# Altium PCB PCB1.PcbDoc
Units mm, origin at the board's own origin, x right, y up, seen from the top; angles counter-clockwise.
Board outline 80.12 x 80.12 mm, 2 copper layers (Top Layer, Bottom Layer); 64 components, 50 nets, 273 pads, 111 vias.
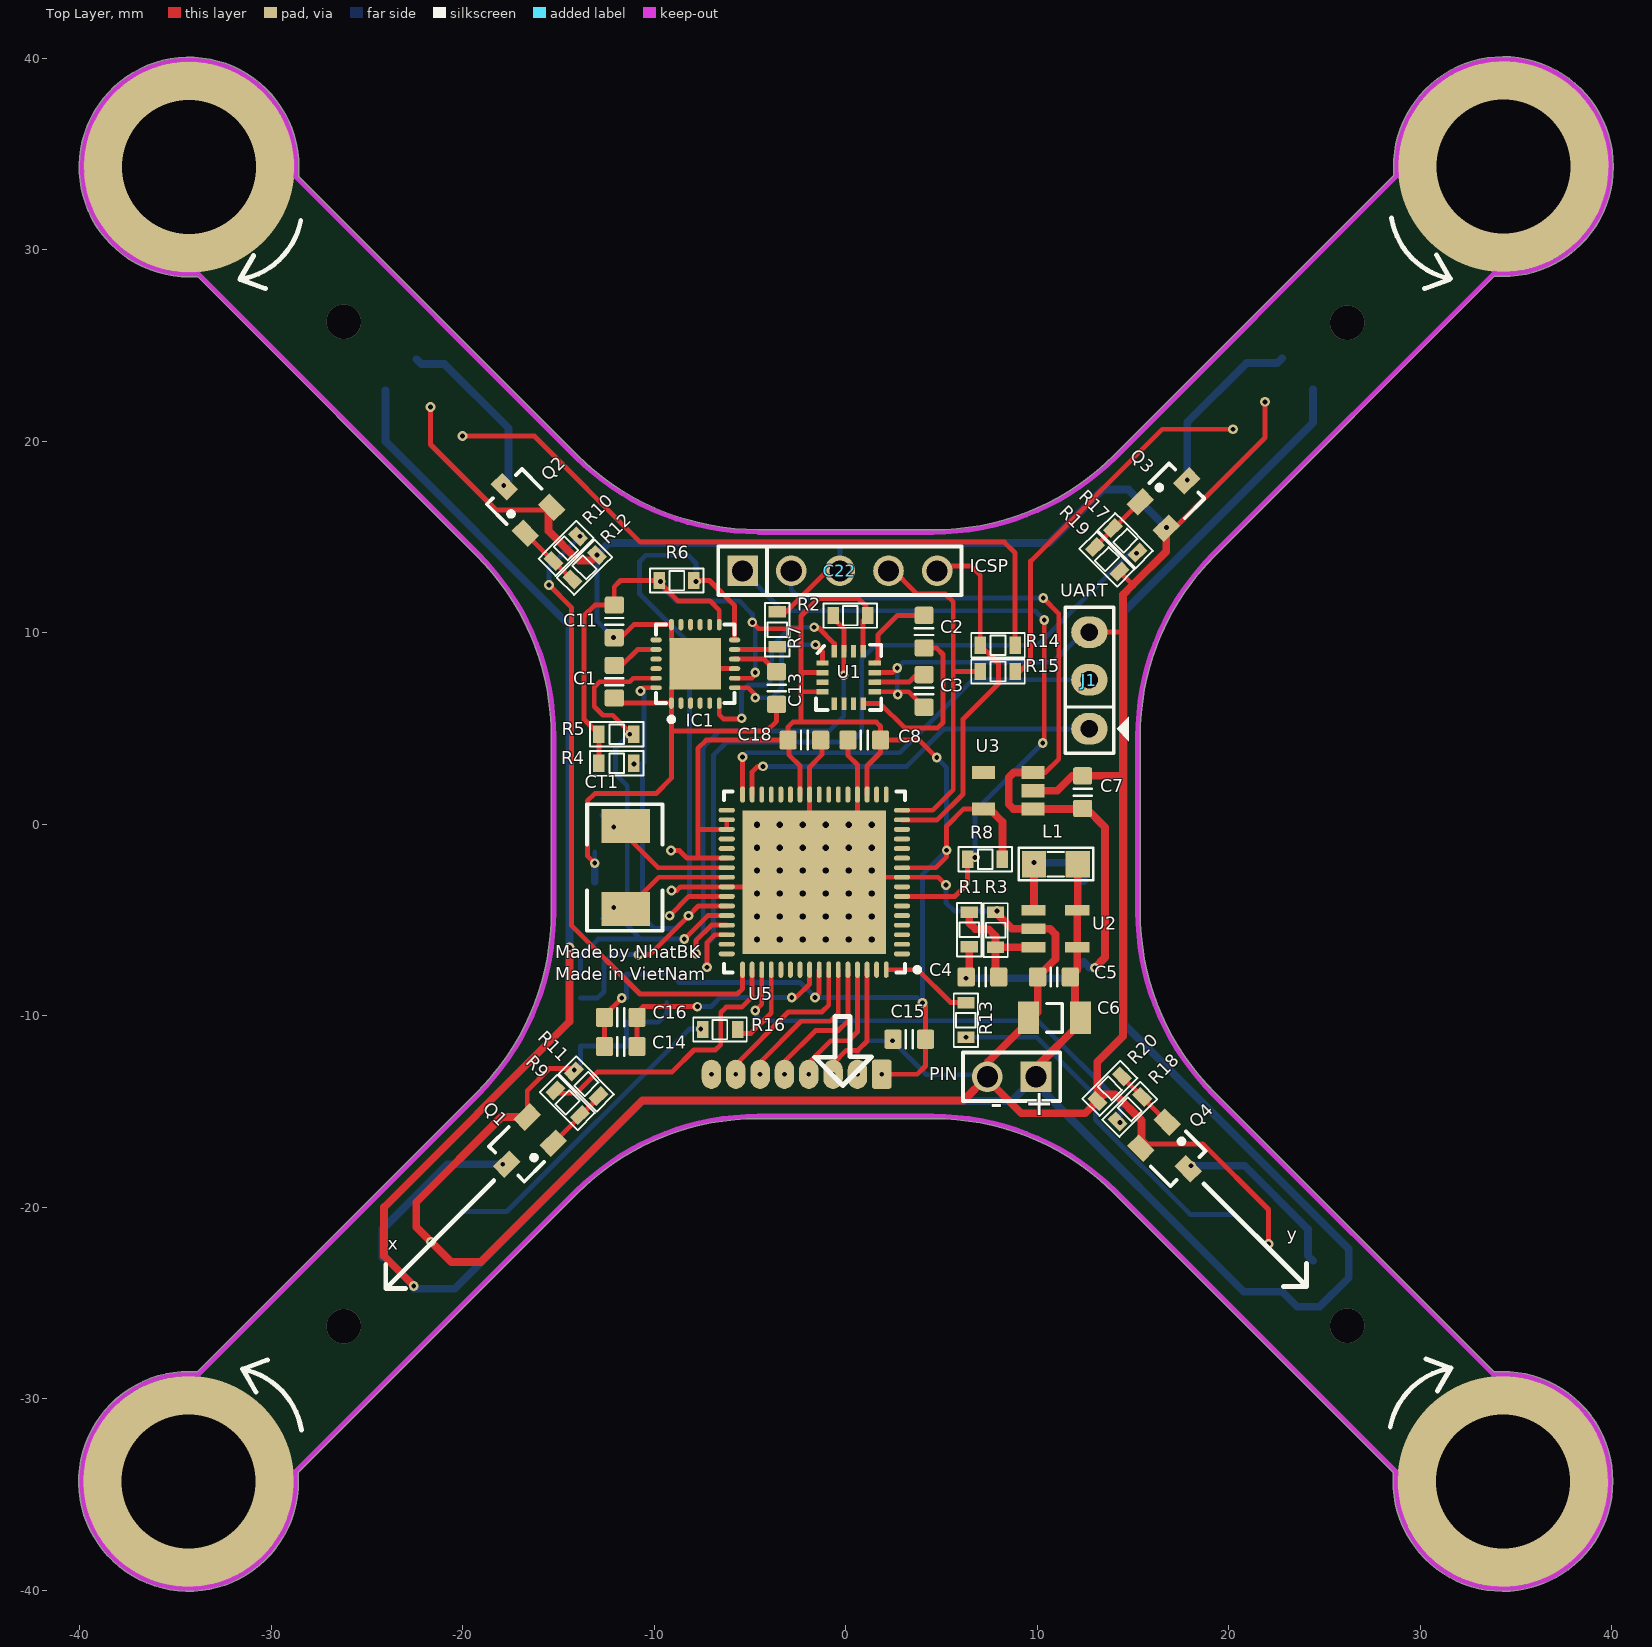
[diagram p0: Top Layer view]
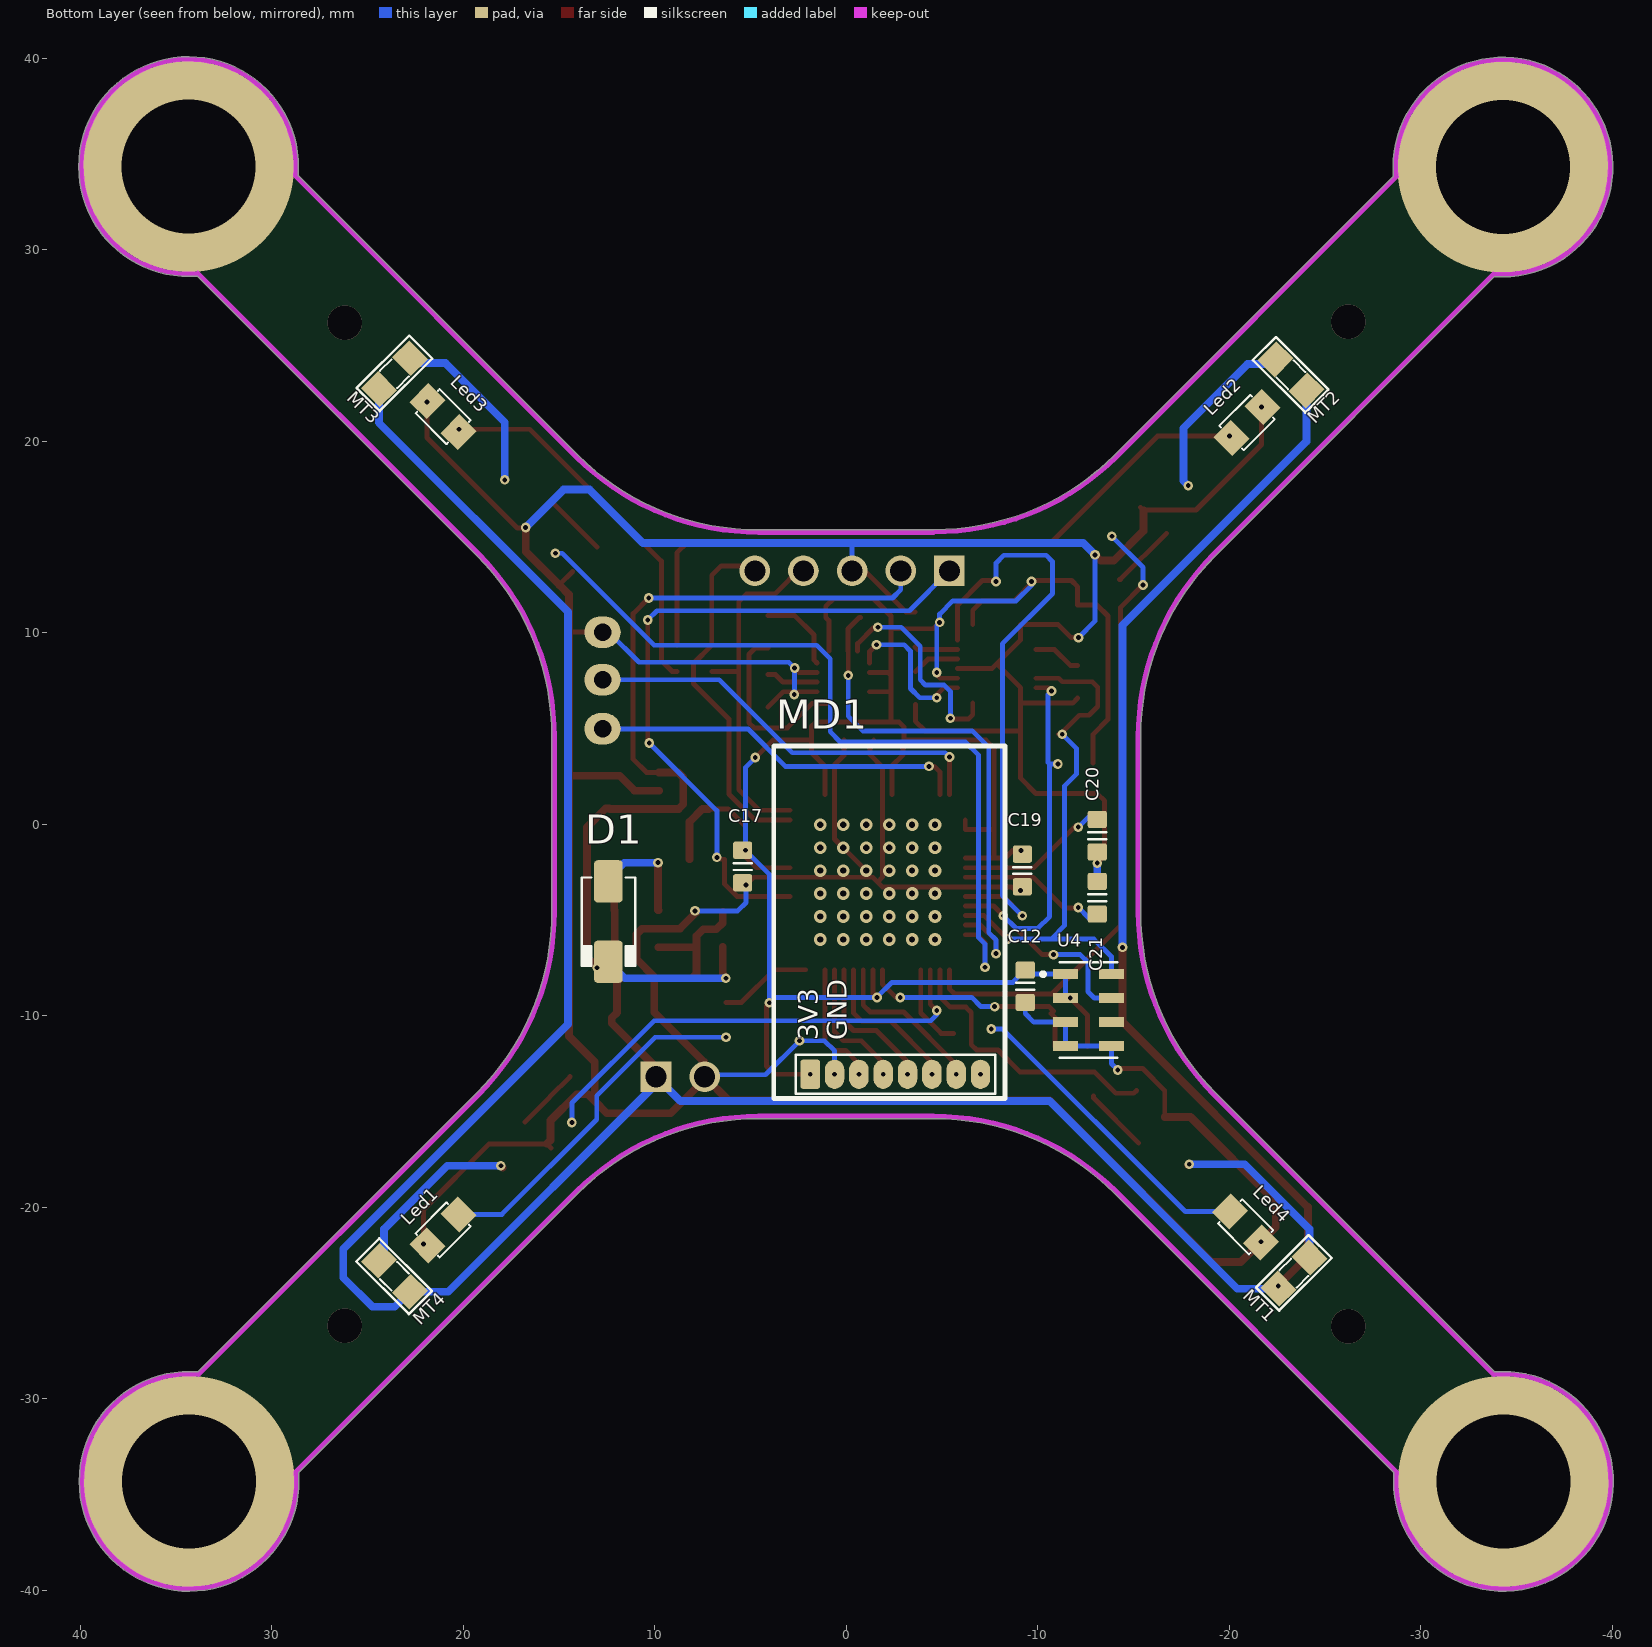
[diagram p1: Bottom Layer view, seen from below]
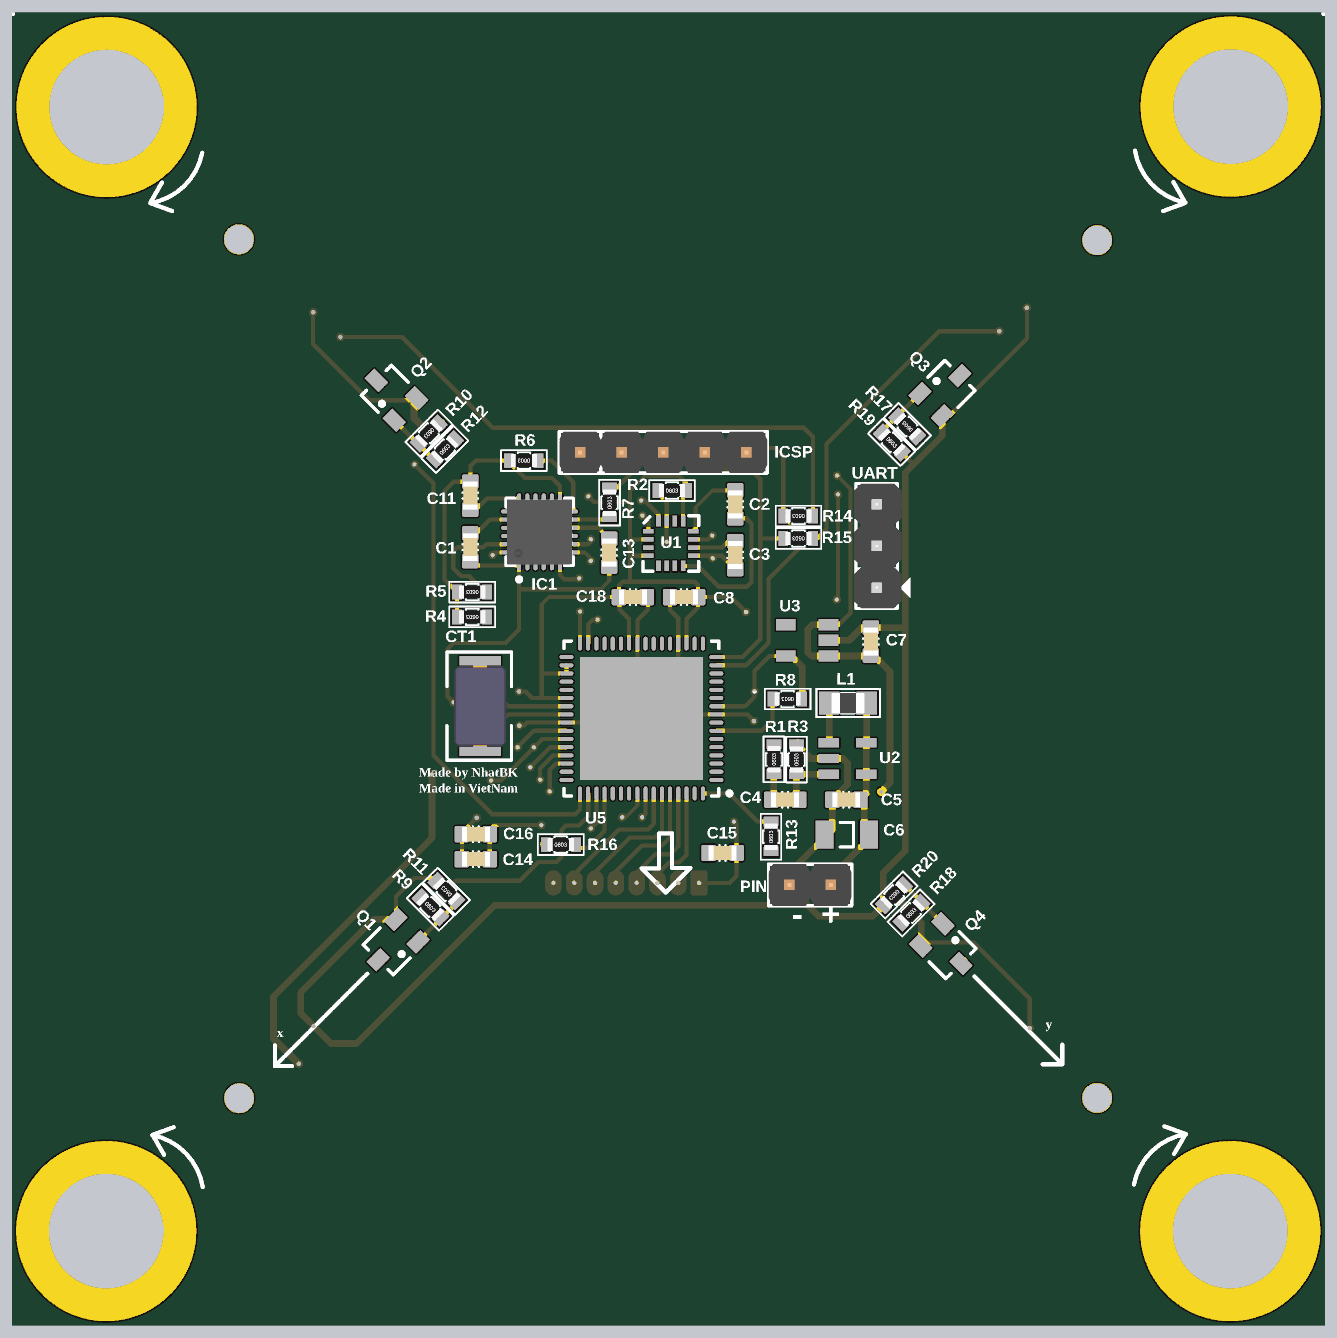
[diagram p2: 3D render of the assembled board from above, using the file's embedded part models]
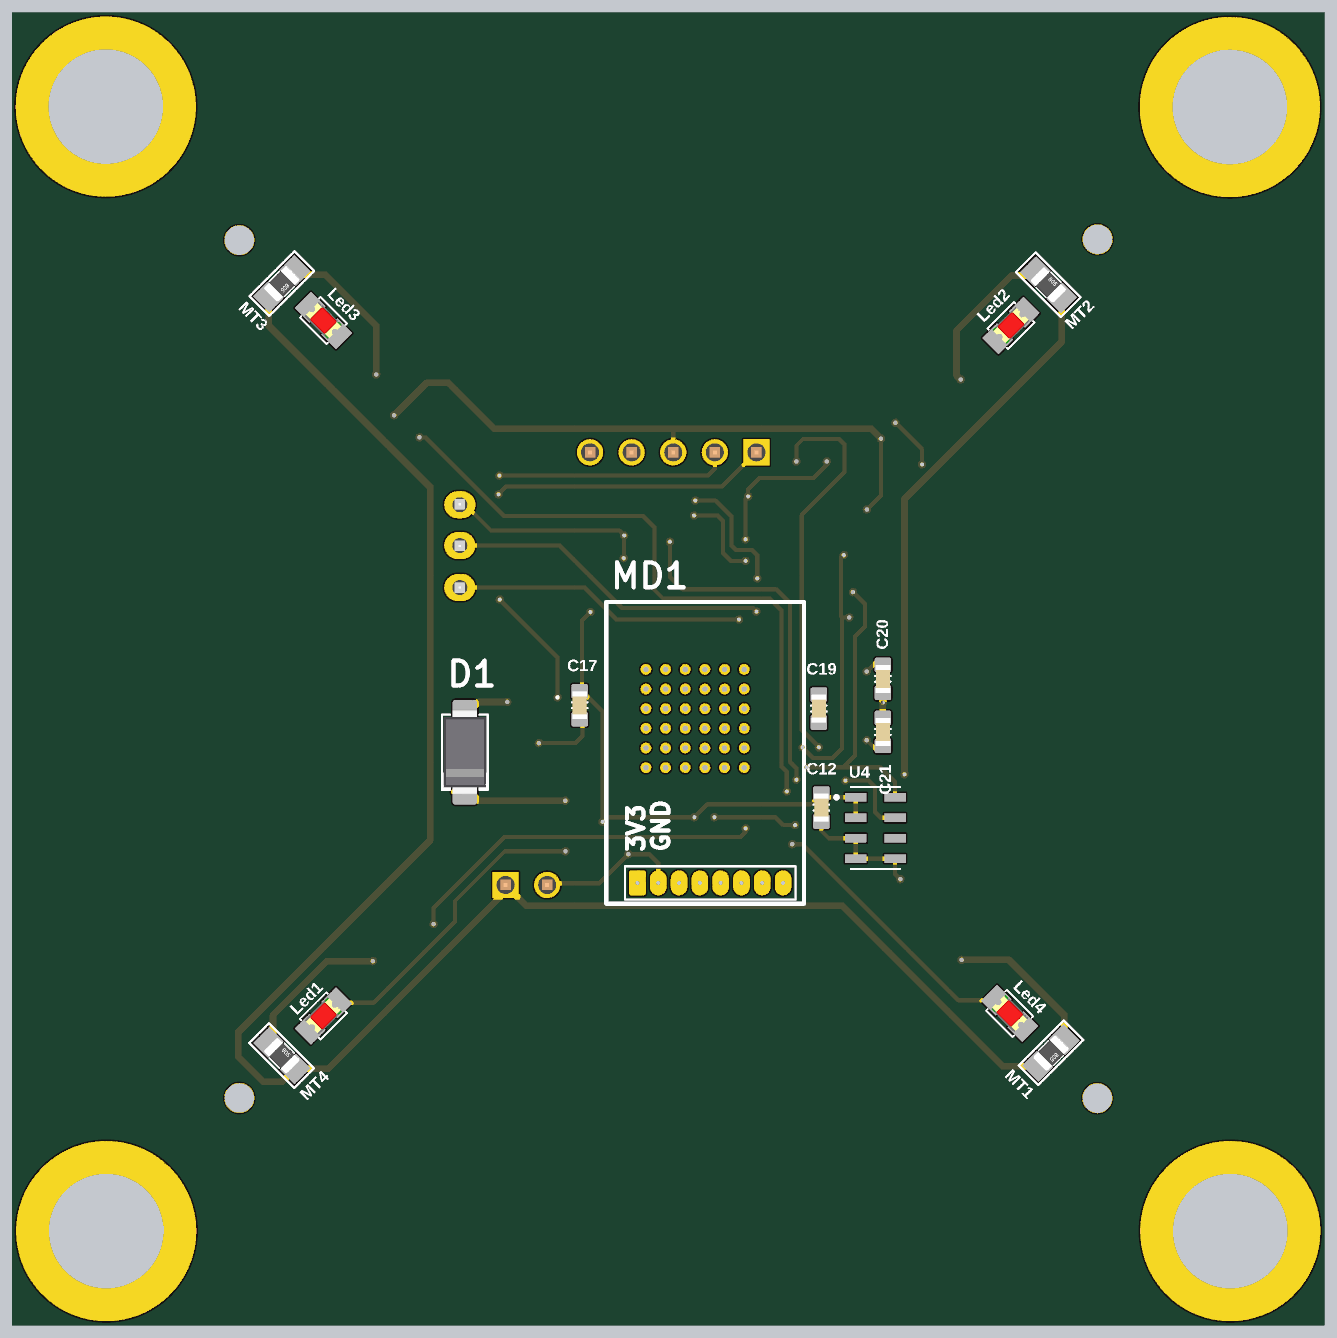
[diagram p3: 3D render of the assembled board from below, using the file's embedded part models]

## Layer stack, top to bottom
Top Solder: solder mask 0.0102, Solder Resist, Dk 3.5
Top Layer: signal copper 0.0356
Dielectric 1: dielectric 0.32, FR-4, Dk 4.8
Bottom Layer: signal copper 0.0356
Bottom Solder: solder mask 0.0102, Solder Resist, Dk 3.5

## Board outline
-33.856,-28.595 ccw(c-34.313,-34.313) -28.577,-34.313 ccw(c-34.313,-34.313) -28.595,-33.856 -14.021,-19.281 ccw(c-14.111,-19.191) -14.013,-19.272 cw(c-4.574,-28.729) -4.572,-15.367 ccw(c-4.572,-15.24) -4.572,-15.367 4.572,-15.367 cw(c4.572,-28.731) 14.021,-19.281 28.595,-33.856 ccw(c34.313,-34.313) 40.048,-34.313 ccw(c34.313,-34.313) 33.856,-28.595 19.281,-14.021 cw(c19.191,-14.111) 19.282,-14.022 19.281,-14.021 cw(c28.731,-4.572) 19.281,-14.021 cw(c28.731,-4.572) 15.367,-4.572 15.367,4.572 cw(c28.731,4.572) 19.281,14.021 ccw(c19.191,14.111) 19.282,14.022 19.281,14.021 33.881,28.621 ccw(c34.338,34.338) 40.073,34.338 ccw(c34.338,34.338) 28.621,33.881 14.021,19.281 cw(c14.111,19.191) 14.022,19.282 14.021,19.281 ccw(c14.111,19.191) 14.021,19.281 ccw(c4.572,28.731) 14.021,19.281 cw(c4.572,28.731) 4.572,15.367 -4.502,15.367 ccw(c-4.572,15.261) -4.573,15.389 cw(c-4.623,28.68) -14.021,19.281 ccw(c-14.111,19.191) -14.021,19.281 ccw(c-14.111,19.191) -14.022,19.282 -14.021,19.281 -28.572,33.832 ccw(c-34.287,34.313) -28.552,34.313 ccw(c-34.287,34.313) -33.854,28.594 -19.281,14.021 cw(c-28.731,4.572) -19.281,14.021 cw(c-19.191,14.111) -19.281,14.021 cw(c-19.191,14.111) -19.282,14.022 -19.281,14.021 cw(c-28.731,4.572) -15.367,4.572 -15.367,-4.572 cw(c-28.731,-4.572) -19.281,-14.021 ccw(c-19.191,-14.111) -19.281,-14.021 ccw(c-28.731,-4.572) -19.281,-14.021

## Design rules (kind name [scope] priority, off if disabled: settings)
Clearance [All] p1: gap=0.203
PolygonConnect [All] p1: connectstyle=Relief reliefconductorwidth=0.254 reliefentries=4 polygonreliefangle="90 Angle" airgapwidth=0.254
RoomDefinition Sheet1 [InComponentClass('Sheet1')] p1: confinementstyle=ConfineIn formatcopy=TRUE lockcomponents=FALSE outline 94.361,-48.768 253.873,-48.768 253.873,-34.798 94.361,-34.798
RoutingVias [All] p1: holewidth=0.254 width=0.508 viastyle="Through Hole" minholewidth=0.254 minwidth=0.508 maxholewidth=0.254 maxwidth=0.508
SolderMaskExpansion [All] p1: expansion=0.102
Width [All] p1: maxlimit=0.635 minlimit=0.254 preferedwidth=0.406
30 further rules are at their usual default settings.

## Components (designator, comment, footprint, x,y, rotation, side; value= is the part's Value field where it differs from the comment)
C1 "105" CAPC1608X90N -12.084,7.442 r270 top
C2 "224" CAPC1608X90N 4.089,10.058 r270 top
C3 "475" CAPC1608X90N 4.089,6.96 r270 top
C4 "221" CAPC1608X90N 7.137,-7.976 r180 top
C5 "104" CAPC1608X90N 10.871,-7.976 r0 top
C6 "tatanlum" CM_S_1206 10.897,-10.109 r180 top
C7 "106" CAPC1608X90N 12.37,1.676 r270 top
C8 "105" CAPC1608X90N 0.965,4.394 r0 top
C11 "105" CAPC1608X90N -12.084,10.592 r90 top
C12 "105" CAPC1608X90N -9.349,-8.458 r90 bottom
C13 "104" CAPC1608X90N -3.607,7.112 r90 top
C14 "104" CAPC1608X90N -11.747,-11.608 r180 top
C15 "106" CAPC1608X90N 3.316,-11.227 r180 top
C16 "106" CAPC1608X90N -11.747,-10.084 r180 top
C17 "105" CAPC1608X90N 5.41,-2.21 r90 bottom
C18 "105" CAPC1608X90N -2.159,4.394 r180 top
C19 "105" CAPC1608X90N -9.195,-2.413 r90 bottom
C20 "22p" CAPC1608X90N -13.106,-0.598 r270 bottom
C21 "22p" CAPC1608X90N -13.106,-3.835 r90 bottom
C22 "ICSP" JP5-D1T -5.385,13.233 r0 top
CT1 "8Mhz" CRYSTAL-SMD5032 -11.481,-2.261 r90 top
D1 "Diode  Schottky 1N5819" DO-214AC 12.421,-5.08 r270 bottom
IC1 "MPU6050" MPU6050 -7.854,8.375 r90 top
J1 "UART" JP3 12.725,7.518 r90 top
L1 "L/0805" SM-IND-0805 12.116,-2.083 r180 top
Led1 "LED" LED-0805-Red 20.244,-20.371 r315 bottom
Led2 "LED" LED-0805-Red -20.117,20.168 r135 bottom
Led3 "LED" LED-0805-Red 20.244,20.472 r45 bottom
Led4 "LED" LED-0805-Red -20.041,-20.218 r225 bottom
MD1 "NRF24L01" "nRF24l01 Mini" 1.88,-13.056 r180 bottom
MT1 "coreless 716" SM-RES-0805 -24.181,-22.631 r315 bottom
MT2 "coreless 716" SM-RES-0805 -22.412,24.273 r225 bottom
MT3 "coreless 716" SM-RES-0805 22.784,24.333 r315 bottom
MT4 "coreless 716" SM-RES-0805 24.4,-22.793 r225 bottom
PIN "Pin3.7V" JP2-D1T 9.931,-13.183 r180 top
Q1 "Si2302" SOT23 -16.815,-16.866 r135 top
Q2 "Si2302" SOT23 -16.942,16.739 r45 top
Q3 "Si2302" SOT23 16.916,17.043 r315 top
Q4 "Si2302" SOT23 16.993,-17.094 r225 top
R1 "33k/0603" RES-SMD-0603 6.452,-5.512 r90 top
R2 "4.7k/0603" RES-SMD-0603 0.229,10.897 r0 top
R3 "10k/0603" RES-SMD-0603 7.823,-5.524 r90 top
R4 "4.7k/0603" RES-SMD-0603 -11.963,3.185 r180 top
R5 "4.7k/0603" RES-SMD-0603 -11.963,4.699 r180 top
R6 "4.7k/0603" RES-SMD-0603 -8.814,12.725 r180 top
R7 "1k/0603" RES-SMD-0603 -3.581,10.16 r90 top
R8 "Res" RES-SMD-0603 7.29,-1.829 r180 top
R9 "100/0603" RES-SMD-0603 -14.529,-14.529 r315 top
R10 "100/0603" RES-SMD-0603 -14.605,14.402 r225 top
R11 "33k/0603" RES-SMD-0603 -13.538,-13.564 r135 top
R12 "33k/0603" RES-SMD-0603 -13.64,13.411 r45 top
R13 "1k" RES-SMD-0603 6.274,-10.236 r90 top
R14 "1k" RES-SMD-0603 7.95,9.347 r180 top
R15 "1k" RES-SMD-0603 7.95,7.976 r180 top
R16 "1k" RES-SMD-0603 -6.566,-10.719 r0 top
R17 "100/0603" RES-SMD-0603 14.605,14.808 r135 top
R18 "100/0603" RES-SMD-0603 14.827,-14.891 r45 top
R19 "33k/0603" RES-SMD-0603 13.64,13.843 r315 top
R20 "33k/0603" RES-SMD-0603 13.792,-13.792 r225 top
U1 "HMC5883L" 16LPCC 0.156,7.669 r0 top
U2 "LM27313XMF" SOT95P285X120-5N 10.947,-5.461 r0 top
U3 "MIC5205/SPX3819M5" SOT-23-5 8.484,1.753 r90 top
U4 "MS561101BA03-50" SON125P500X300X100-8N -12.649,-9.703 r180 bottom
U5 "PIC32MX440F256H-80I/MR" QFN-MR64_M -1.638,-3.02 r180 top

## Footprints (in the part's own frame and the unit in brackets; to place one, negate y for a bottom-side part, rotate by r counter-clockwise, add the part's x,y. Pads: shape width x height; smd on the part's side, far side on the other; paste and mask are expansions set on the pad)
16LPCC [mm]
  rect 0.65x0.28 smd: 1(-1.37,0.75) 2(-1.37,0.25) 3(-1.37,-0.25) 4(-1.37,-0.75) 9(1.37,-0.75) 10(1.37,-0.25) 11(1.37,0.25) 12(1.37,0.75)
  rect 0.28x0.65 smd: 5(-0.75,-1.37) 6(-0.25,-1.37) 7(0.25,-1.37) 8(0.75,-1.37) 13(0.75,1.37) 14(0.25,1.37) 15(-0.25,1.37) 16(-0.75,1.37)
  silkscreen extent -1.7,-1.7 1.7,1.7
CAPC1608X90N [mm] "Chip Capacitor, Body 1.6x0.8mm, EIA 0603, IPC Medium Density"
  round 0.254 on Mech15: 0(0,0)
  rrect25% 0.9x1 smd: 1(-0.85,0) 2(0.85,0)
  silkscreen extent -0.18,-0.48 0.18,0.48, body extent -0.85,-0.45 0.85,0.45, height 0.89
CM_S_1206 [mm] "Chip Capacitor, Body 3.2x1.6mm, IPC High Density"
  rect 1.1x1.7 smd: 1(-1.35,0) 2(1.35,0)
  silkscreen extent -0.41,-0.75 0.4,0.75, body extent -1.7,-0.9 1.7,0.9, height 1.3
CRYSTAL-SMD5032 [mil] "DO-214-AA/SMB; 2 C-Bend Leads; Body 5.3 x 3.6 mm, inc. leads (LxW)"
  rect 70x100 smd: 1(-85,0) 2(85,0)
  silkscreen extent -130,-75 130,80, body extent -98,-63 98,63, height 51
DO-214AC [mm] "JEDEC DO214 variation AC. SMA"
  round 0.508 on Mech15: 0(0,0)
  rrect25% 2.2x1.5 smd: A(-2.1,0) K(2.1,0)
  silkscreen extent -2.3,-1.4 2.3,1.4, body extent -2.6,-1.3 2.6,1.3, height 2.42
JP2-D1T [mm] "2 pins, 1 row, straight, gold plating"
  rect 1.6x1.6 hole 1.1: 1(0,0)
  round 1.6 hole 1.1: 2(2.54,0)
  silkscreen extent -1.27,-1.27 3.81,1.27, body extent -1.27,-1.27 3.81,1.27, height 8.54
JP3 [mil] "Jumper 3"
  oval 65x75 hole 36: 1(-100,0) 2(1,0) 3(99,0)
  silkscreen extent -150,-81 150,50, body extent -150,-60 150,55, height 355
JP5-D1T [mm] "5 pins, 1 row, straight, gold plating"
  rect 1.6x1.6 hole 1.1: 1(0,0)
  round 1.6 hole 1.1: 2(2.54,0) 3(5.08,0) 4(7.62,0) 5(10.16,0)
  silkscreen extent -1.27,-1.27 11.43,1.27, body extent -1.27,-1.27 11.43,1.27, height 8.54
LED-0805-Red [mil]
  rect 50x55 smd: 1(0,0) 2(90,0)
  silkscreen extent 0,-35 90,35, body extent 5,-25 85,25, height 43
MPU6050 [mm] "QFN-24N"
  oval 0.6x0.25 smd: 1(-2.05,1.25) 2(-2.05,0.75) 3(-2.05,0.25) 4(-2.05,-0.25) 5(-2.05,-0.75) 6(-2.05,-1.25) 13(2.05,-1.25) 14(2.05,-0.75) 15(2.05,-0.25) 16(2.05,0.25) 17(2.05,0.75) 18(2.05,1.25)
  oval 0.25x0.6 smd: 7(-1.25,-2.05) 8(-0.75,-2.05) 9(-0.25,-2.05) 10(0.25,-2.05) 11(0.75,-2.05) 12(1.25,-2.05) 19(1.25,2.05) 20(0.75,2.05) 21(0.25,2.05) 22(-0.25,2.05) 23(-0.75,2.05) 24(-1.25,2.05)
  rect 2.7x2.7 smd: 25(0,0)
  silkscreen extent -3.02,-2.05 2.05,2.05, body extent -2,-2 2,2, height 1
"nRF24l01 Mini" [mil] "Connector; Header; 6 Position, 0.050\" pitch"
  oval 40x60 hole 10: 1(50,0) 3(100,0) 4(150,0) 5(200,0) 6(250,0) 7(300,0) 8(350,0)
  rrect25% 40x60 hole 10: 2(0,0)
  silkscreen extent -75,-50 400,675
QFN-MR64_M [mm] "QFN, 64-Leads, Body 9x9mm, Pitch 0.5mm, IPC Low Density"
  oval 0.85x0.25 smd: 1(-4.575,3.75) 2(-4.575,3.25) 3(-4.575,2.75) 4(-4.575,2.25) 5(-4.575,1.75) 6(-4.575,1.25) 7(-4.575,0.75) 8(-4.575,0.25) 9(-4.575,-0.25) 10(-4.575,-0.75) 11(-4.575,-1.25) 12(-4.575,-1.75) 13(-4.575,-2.25) 14(-4.575,-2.75) 15(-4.575,-3.25) 16(-4.575,-3.75) 33(4.575,-3.75) 34(4.575,-3.25) 35(4.575,-2.75) 36(4.575,-2.25) 37(4.575,-1.75) 38(4.575,-1.25) 39(4.575,-0.75) 40(4.575,-0.25) 41(4.575,0.25) 42(4.575,0.75) 43(4.575,1.25) 44(4.575,1.75) 45(4.575,2.25) 46(4.575,2.75) 47(4.575,3.25) 48(4.575,3.75)
  oval 0.25x0.85 smd: 17(-3.75,-4.575) 18(-3.25,-4.575) 19(-2.75,-4.575) 20(-2.25,-4.575) 21(-1.75,-4.575) 22(-1.25,-4.575) 23(-0.75,-4.575) 24(-0.25,-4.575) 25(0.25,-4.575) 26(0.75,-4.575) 27(1.25,-4.575) 28(1.75,-4.575) 29(2.25,-4.575) 30(2.75,-4.575) 31(3.25,-4.575) 32(3.75,-4.575) 49(3.75,4.575) 50(3.25,4.575) 51(2.75,4.575) 52(2.25,4.575) 53(1.75,4.575) 54(1.25,4.575) 55(0.75,4.575) 56(0.25,4.575) 57(-0.25,4.575) 58(-0.75,4.575) 59(-1.25,4.575) 60(-1.75,4.575) 61(-2.25,4.575) 62(-2.75,4.575) 63(-3.25,4.575) 64(-3.75,4.575)
  rect 7.5x7.5 smd: 65(0,0)
  silkscreen extent -5.5,-4.73 4.73,4.73, body extent -4.57,-4.57 4.57,4.57, height 1
RES-SMD-0603 [mm]
  rect 0.6x0.9 smd: 1(-0.889,0) 2(0.927,0)
  silkscreen extent -1.4,-0.64 1.4,0.64, body extent -0.8,-0.4 0.8,0.4, height 0.43
SM-IND-0805 [mil]
  rect 50x55 smd: 1(0,0) 2(90,0)
  silkscreen extent -32,-34 121,33, body extent 6,-25 84,25, height 10
SM-RES-0805 [mil]
  rect 50x55 smd: 1(0,0) 2(90,0)
  silkscreen extent -32,-34 121,33, body extent 6,-25 84,25, height 31
SON125P500X300X100-8N [mm]
  rect 1.31x0.53 smd: 1(-1.2,1.875) 2(-1.2,0.625) 3(-1.2,-0.625) 4(-1.2,-1.875) 5(1.2,-1.875) 6(1.2,-0.625) 7(1.2,0.625) 8(1.2,1.875)
  silkscreen extent -2.48,-2.5 1.5,2.5
SOT23 [mm] "SOT 23 _ 1-3-2"
  rect 0.85x1.2 smd: 1(-0.94,-1.245) 2(0.985,-1.25) 3(0.005,1.25)
  silkscreen extent -1.29,-0.2 1.31,1.25, body extent -1.5,-0.69 1.52,1.25, height 1.27
SOT95P285X120-5N [mil]
  rect 50x22 smd: 1(-45,38) 2(-45,0) 3(-45,-38) 4(45,-38) 5(45,38)
SOT-23-5 [mm]
  rect 0.69x1.2 smd: 1(-0.95,-1.3) 2(0,-1.3) 3(0.95,-1.3) 4(0.95,1.3) 5(-0.95,1.3)

## Part data
C1 C8 C11 C17 C18 C19: library part "CAP C_0603", "Capacitor SMD 105/0603, Addr:Linhkien69.vn"
C2 C20 C21: library part "CAP C_0603", "Capacitor SMD 224/0603, Addr:Linhkien69.vn"
C3: library part "CAP C_0603", "Capacitor SMD 475/0603, Addr:Linhkien69.vn"
C4: library part "CAP C_0603", "Capacitor SMD 221/0603, Addr:Linhkien69.vn"
C5 C7 C12 C13 C14 C15 C16: library part "CAP C_0603", "Capacitor SMD 106/0603, Addr:Linhkien69.vn"
C6: library part "CAP Tatalium", "Tatalium SMD 47uf/1206, Addr:Linhkien69.vn"
C22: library part JP5, "jump 5pin                 Addr:Linhkien69.vn"
CT1: library part CRYSTAL, "Crystal 8Mhz SMD 0805, Addr:Linhkien69.vn"
D1: "Diode SS24 SMD 0805, Addr:Linhkien69.vn"
IC1 U4: "Addr:Banlinhkien.vn"
J1: library part JP3, "Jumper 3"
L1: library part "Inductor Iron", "Inductor SMD 4.7uH/0805, Addr:Linhkien69.vn"
Led1 Led2 Led3 Led4: library part "LED SMD", "LED SMD0805                Addr:Linhkien69.vn"
MD1: "nRF24L01 mini           Addr:mualinhkien.vn"
MT1 MT2 MT3 MT4: library part R1/4W, "Motor Coreless716       Addr:mualinhkien.vn"
PIN: library part JP2, "Addr:chotroihn.vn"
Q1 Q2 Q3 Q4: library part Si2302DS, "Transistor SMD            Addr:Banlinhkien.vn"
R1 R9 R10 R11 R12 R17 R18 R19 R20: library part Res-SMD, "Resistor SMD 33k/0603, Addr:Linhkien69.vn"
R2 R4 R5 R6: library part Res-SMD, "Resistor SMD 4.7k/0603, Addr:Linhkien69.vn"
R3: library part Res-SMD, "Resistor SMD 10k/0603, Addr:Linhkien69.vn"
R7 R13 R14 R15 R16: library part Res-SMD, "Resistor SMD 1k/0603, Addr:Linhkien69.vn"
R8: library part Res-SMD, "Resistor"
U1: "Digital Compass +/- 0.8g, Lcc-16"
U2: "Boost SMD/SOT95,  Addr:Banlinhkien.vn"
U3: library part PMIC-MIC5205-3.3YMSTR(SOT23-5), "3.3V SMD/SOT23,    Addr:Banlinhkien.vn"
U5: "High Performance 80 MHz MIPS-Based 32-Bit Flash Microcontroller with USB, 256KB Program Memory, 64-pin QFN"

## Via types
v1: diameter 0.508, hole 0.254, Top Layer to Bottom Layer, tented both sides, 66 vias
v2: diameter 0.66, hole 0.33, Top Layer to Bottom Layer, tented top, 36 vias
v3: diameter 11, hole 7, Top Layer to Bottom Layer, 4 vias
v4: diameter 1.8, hole 1.8, Top Layer to Bottom Layer, 4 vias
v5: diameter 0.508, hole 0.254, Top Layer to Bottom Layer, 1 vias

## Nets (pads, with @x,y where several pads share a name; then routed paths per layer and width w, separated by ;. In a path a pad name is that pad's centre, name@x,y a point inside that pad or via, vN(x,y) a via of type N, cw(c..) or ccw(c..) an arc to the next point about the centre after c; other vN are vias at no path point)
3V3: C8.2 C11.2 C12.2 C14.2 C15.1 C16.2 C17.2 C18.2 C19.2 IC1.8 IC1.13 MD1.2 R2.2 R4.2 R5.2 R6.2 R8.1 U1.2 U1.4 U1.13 U3.5 U4.1 U4.2 U5.10 U5.19 U5.26 U5.34 U5.35 U5.38 U5.57 | length 127.6
  Top Layer w0.254: R4.2 R5.2 -13.665,5.474 -13.665,10.871 -13.095,11.442 C11.2 -12.084,12.402 -11.76,12.725 -9.83,12.725 -8.763,11.659 -7.087,11.659 -6.604,11.176 IC1.13 ; C14.2 C16.2 -12.597,-9.98 v1(-11.694,-9.078) ; v1(-9.119,-1.372) -8.687,-1.372 -8.289,-1.77 -7.722,-1.77 ; U5.38 -7.722,-1.77 ; U5.34 U5.35 -7.61,-0.27 -7.722,-0.381 ; IC1.8 -4.898,7.625 -4.724,7.798 v1(-4.724,7.925) ; v1(-4.877,10.541) -4.547,10.211 -2.337,10.211 ; C18.2@-3.072,4.331 -2.972,4.23 -2.972,3.632 -2.388,3.048 U5.26 ; v1(-1.6,-9.042) -1.388,-8.83 U5.57 ; U1.4 -2.301,6.919 -2.337,6.883 ; U1.2 -2.19,7.919 -2.337,7.772 ; U1.13 0.906,10.635 1.067,10.795 1.067,11.379 0.66,11.786 -1.422,11.786 -2.337,10.871 -2.337,10.211 ; U5.19 1.112,3.043 1.815,3.746 C8.2 ; MD1.2 3.734,-13.056 4.166,-12.624 C15.1 4.166,-9.474 v1(4.013,-9.322) ; U5.10 4.69,-2.27 5.27,-1.69 v1(5.27,-1.36) 5.27,-0.09 6.162,0.803 U3.5 ; v1(4.75,3.48) 3.835,4.394 C8.2 ; -7.722,-1.77 -7.722,-0.381 ; -7.722,-0.381 -7.722,3.962 -7.29,4.394 C18.2 -3.009,5.094 -2.769,5.334 -2.337,5.334 ; -2.337,5.334 -2.337,6.883 ; -2.337,5.334 1.6,5.334 1.815,5.119 C8.2 ; -2.337,6.883 -2.337,7.772 ; -2.337,7.772 -2.337,10.211
  Top Layer w0.406: U3.5 7.503,0.803 8.179,0.127 R8.1
  Bottom Layer w0.254: v1(-11.694,-9.078) U4.2 U4.1 -9.569,-7.828 C12.2 -8.702,-8.255 -2.388,-8.255 v1(-1.6,-9.042) 3.734,-9.042 v1(4.013,-9.322) 4.013,-2.616 v1(5.27,-1.36) 5.27,2.96 v1(4.75,3.48) ; v1(-9.677,12.675) -9.677,12.471 -8.865,11.659 -5.563,11.659 -4.877,10.973 v1(-4.877,10.541) -4.724,10.389 v1(-4.724,7.925)
5V: C4.2 C7.2 C22.2 D1.K R1.1 U3.1 U3.3 | length 49.5
  Top Layer w0.254: U3.3 10.424,2.703 11.125,3.404 11.125,10.998 v1(10.312,11.811)
  Top Layer w0.406: v1(6.287,-8.04) C4.2 6.452,-7.811 R1.1 ; U3.3 8.773,2.703 8.509,2.438 8.509,1.041 8.748,0.803 U3.1 12.346,0.803 C7.2 12.559,0.826 13.538,-0.152 13.538,-6.96 v5(13.005,-7.493)
  Bottom Layer w0.254: C22.2 -2.845,12.243 -2.413,11.811 v1(10.312,11.811)
  Bottom Layer w0.406: v1(6.287,-8.04) 11.561,-8.04 D1.K 12.734,-7.493 v5(13.005,-7.493)
CE: MD1.3 U5.62 | length 6.6
  Top Layer w0.254: MD1.3 -0.66,-12.497 0.025,-11.811 0.635,-11.811 1.112,-11.334 U5.62
CSN: MD1.4 U5.61 | length 7.1
  Top Layer w0.254: MD1.4 -1.93,-12.446 -0.787,-11.303 0.152,-11.303 0.612,-10.843 U5.61
FB: C4.1 R1.2 R3.1 U2.3 | length 6.4
  Top Layer w0.406: R1.2 6.451,-5.156 6.782,-5.486 7.468,-5.486 7.823,-5.842 R3.1 R3.1@7.823,-6.439 ; C4.1 7.823,-7.812 R3.1@7.823,-6.439 ; U2.3 7.836,-6.426 R3.1@7.823,-6.439
GND: C1.2 C3.2 C5.1 C6.2 C7.1 C8.1 C11.1 C12.1 C13.1 C15.2 C17.1 C18.1 C19.1 C20.2 C21.2 C22.3 IC1.1 IC1.9 IC1.18 IC1.25 J1.3 Led1.2 Led2.2 Led3.2 Led4.2 MD1.1 PIN.2 Q1.2 Q2.2 Q3.2 Q4.2 R3.2 R7.2 R11.2 R12.2 R19.2 R20.2 U1.9 U1.11 U2.2 U3.2 U4.3 U4.4 U4.5 U5.9 U5.20 U5.25 U5.41 U5.65 | length 287.9
  Top Layer w0.254: v1(-21.682,21.784) -21.682,19.828 -18.263,16.408 Q2.2@-15.504,16.408 ; Q1.2 -16.628,-13.91 -15.469,-12.751 R11.2@-14.351,-12.751 ; Q2.2@-15.519,16.393 Q2.2@-15.504,16.408 ; Q2.2 Q2.2@-15.504,16.408 ; v1(-13.106,-2.032) -13.487,-1.651 -13.487,1.219 -13.106,1.6 -9.906,1.6 -9.104,2.402 -9.104,4.938 ; v1(-12.128,9.742) C11.1 -11.747,9.742 -11.064,10.425 IC1.18 -9.104,9.625 IC1.25 ; C1.2 -11.816,6.325 IC1.1 ; v1(-9.093,-3.454) -8.814,-3.454 -8.629,-3.27 U5.41 -1.888,-3.27 U5.65 ; IC1.9 -7.604,8.125 IC1.25 ; C13.1 -3.607,5.385 -4.115,4.877 -9.042,4.877 -9.104,4.938 ; R7.2 -3.112,11.087 -0.711,13.487 C22.3@-0.279,13.487 ; C18.1@-1.436,4.394 -1.245,4.203 -1.245,3.632 -1.888,2.989 U5.25 -1.888,-2.77 U5.65 ; v2(-1.038,-2.42) v2(0.162,-1.22) 0.612,-0.77 U5.20 0.612,3.096 0.115,3.593 C8.1 ; U1.9 v1@2.718,6.919 ; U1.11 2.458,7.919 v1(2.692,8.153) ; v1(2.718,6.774) v1@2.718,6.919 ; C3.2 3.28,6.919 v1@2.718,6.919 ; v1(5.232,-3.175) 4.827,-2.77 U5.9 -1.388,-2.77 U5.65 ; J1.3 14.453,10.033 14.478,10.058 ; R19.2 14.986,12.497 ; Q4.2 15.631,-16.688 18.644,-16.688 22.073,-20.117 v1(22.073,-21.92) ; Q3.2@16.739,15.463 17.164,15.463 21.895,20.193 v1(21.895,22.054) ; -9.104,4.938 IC1.1 ; IC1.1 -9.104,7.125 IC1.25
  Top Layer w0.406: Q1.2 -17.977,-15.285 -22.428,-19.736 -22.428,-21.031 v1(-21.657,-21.802) -20.599,-22.86 -19.05,-22.86 -10.617,-14.427 6.147,-14.427 PIN.2 ; Q2.2@-15.519,16.393 -15.519,15.316 -13.97,13.767 -13.284,13.767 v1(-12.985,14.067) ; R3.2 8.687,-5.461 U2.2 10.668,-5.461 10.947,-5.74 10.947,-7.049 C5.1 10.021,-9.816 7.417,-12.421 7.417,-13.335 9.169,-15.088 12.497,-15.088 R20.2 ; U3.2 11.049,1.753 11.823,2.526 C7.1 14.414,2.526 14.478,2.591 ; Q4.2@15.631,-16.688 15.443,-16.5 15.443,-15.469 14.072,-14.097 13.488,-14.097 R20.2 ; Q3.2 16.729,14.24 14.986,12.497 14.478,11.989 14.478,10.058 14.478,2.591 ; R20.2 13.137,-12.415 14.478,-11.074 14.478,2.591
  Bottom Layer w0.254: Led2.2 v1(-21.682,21.784) ; v1(-14.173,-12.827) -13.849,-12.503 U4.5 U4.4 U4.3 -9.794,-10.328 -9.349,-9.882 C12.1 ; v1(-13.106,-2.032) C20.2 ; v1(-12.985,14.067) -12.985,10.599 v1(-12.128,9.742) ; C22.3 -0.305,14.605 -0.229,14.681 ; MD1.1 0.61,-11.836 1.143,-11.303 v1(2.438,-11.303) 4.216,-13.081 6.883,-13.081 PIN.2@7.417,-13.614 ; v1(2.718,6.774) 2.692,6.8 v1(2.692,8.153) 2.997,8.458 10.82,8.458 12.395,10.033 J1.3 ; v1(5.232,-3.175) 5.232,-4.089 5.664,-4.521 v1(7.899,-4.521) ; Led3.2 v1(21.895,22.054)
  Bottom Layer w0.406: Led4.2 v1(-21.657,-21.802) ; C21.2 v1(-13.106,-2.032) ; v1(-12.985,14.067) -12.37,14.681 -0.229,14.681 10.617,14.681 13.411,17.475 14.757,17.475 v1(16.739,15.494)
  other v2: -4.638,-6.02 -3.438,-6.02 -2.238,-6.02 -1.038,-6.02 0.162,-6.02 1.362,-6.02 -4.638,-4.82 -3.438,-4.82 -2.238,-4.82 -1.038,-4.82 0.162,-4.82 1.362,-4.82 -4.638,-3.62 -3.438,-3.62 -2.238,-3.62 -1.038,-3.62 0.162,-3.62 1.362,-3.62 -4.638,-2.42 -3.438,-2.42 -2.238,-2.42 0.162,-2.42 1.362,-2.42 -4.638,-1.22 -3.438,-1.22 -2.238,-1.22 -1.038,-1.22 1.362,-1.22 -4.638,-0.02 -3.438,-0.02 -2.238,-0.02 -1.038,-0.02 0.162,-0.02 1.362,-0.02
HMC_: R2.1 U1.15 U5.45 | length 27
  Top Layer w0.254: v1(-7.823,-6.756) -7.823,-6.082 -7.011,-5.27 U5.45 ; R2.1@-0.749,10.795 -0.686,10.795 -0.094,10.203 U1.15 -0.102,9.031 v1(-0.102,7.772)
  Bottom Layer w0.254: v1(-7.823,-6.756) -7.823,-6.045 -7.442,-5.664 -7.442,4.013 -6.579,4.877 -0.864,4.877 -0.102,5.639 v1(-0.102,7.772)
IRQ: MD1.8
LED1: R16.2 U5.52 | length 4.4
  Top Layer w0.254: R16.2@-5.613,-10.922 -4.953,-10.922 -3.888,-9.857 U5.52
LED2: C22.4 R15.2 U5.16 | length 18.5
  Top Layer w0.254: C22.4@2.261,13.487 3.734,12.014 5.207,12.014 5.613,11.608 5.613,7.975 ; U5.16 4.54,0.73 5.613,1.803 5.613,7.975 ; R15.2 5.613,7.975
LED3: C22.5 R14.2 U5.15 | length 18.7
  Top Layer w0.254: U5.15 4.777,0.23 6.121,1.575 6.121,5.486 7.976,7.341 7.976,8.395 R14.2 7.023,12.992 6.528,13.487 C22.5@4.801,13.487
LED4: R13.2 U5.64 | length 4.9
  Top Layer w0.254: U5.64 3.759,-7.595 5.474,-9.309 R13.2
MCLR: C22.1 R8.2 U5.7 | length 36.1
  Top Layer w0.254: U5.7 5.705,-3.77 6.363,-3.111 R8.2 6.655,-1.829 v1(6.756,-1.727) ; v1(10.287,4.242) 10.363,4.318 v1(10.363,10.668)
  Bottom Layer w0.254: C22.1 -3.302,11.151 9.881,11.151 v1(10.363,10.668) ; v1(6.756,-1.727) 6.756,0.711 v1(10.287,4.242)
MISO: MD1.7 U5.58 | length 8.5
  Top Layer w0.254: MD1.7 -5.74,-12.548 -2.997,-9.804 -1.245,-9.804 -0.888,-9.447 U5.58
MOSI: MD1.6 U5.59 | length 8
  Top Layer w0.254: MD1.6 -4.47,-12.421 -2.337,-10.287 -0.813,-10.287 -0.388,-9.862 U5.59
MPU_: IC1.12 R6.1 U5.42 | length 32.1
  Top Layer w0.254: v1(-9.195,-4.775) -8.189,-3.77 U5.42 ; R6.1 -7.112,12.725 -5.804,11.417 IC1.12 ; R6.1@-7.849,12.649 v1(-7.823,12.675)
  Bottom Layer w0.254: v1(-9.195,-4.775) -8.153,-3.734 -8.153,9.423 -10.77,12.04 -10.77,13.716 -10.439,14.046 -8.23,14.046 -7.823,13.64 v1(-7.823,12.675)
NetC1_1: C1.1 IC1.20 | length 2.5
  Top Layer w0.254: C1.1 -11.698,8.292 -10.865,9.125 IC1.20
NetC2_1: C2.1 U1.12 | length 4.4
  Top Layer w0.254: U1.12 1.676,8.569 1.676,9.881 2.704,10.908 C2.1
NetC2_2: C2.2 U1.8 | length 9.5
  Top Layer w0.254: U1.8 1.803,6.299 3.073,5.029 4.801,5.029 5.08,5.309 5.08,8.865 4.736,9.208 C2.2
NetC3_1: C3.1 U1.10 | length 2.7
  Top Layer w0.254: U1.10 3.304,7.419 3.695,7.81 C3.1
NetC13_2: C13.2 IC1.10 | length 2.5
  Top Layer w0.254: IC1.10 -4.269,8.625 C13.2
NetC14_1: C14.1 C16.1 U5.56 | length 12.3
  Top Layer w0.254: C14.1 C16.1 -10.693,-9.881 -10.82,-9.754 -10.592,-9.525 v1(-7.747,-9.525) ; v1(-2.819,-9.042) -2.591,-9.042 -1.888,-8.339 U5.56
  Bottom Layer w0.254: v1(-7.747,-9.525) -7.036,-9.525 -6.553,-9.042 v1(-2.819,-9.042)
NetD1_A: D1.A L1.2 U2.1 | length 5.5
  Top Layer w0.406: U2.1 9.83,-4.47 L1.2
  Bottom Layer w0.406: v1(9.83,-2.007) 11.582,-2.007 12.421,-2.845 D1.A
NetIC1_11: IC1.11 R7.1 | length 2.3
  Top Layer w0.254: IC1.11 -3.728,9.125 R7.1
NetLed1_1: Led1.1 R13.1 | length 18.5
  Bottom Layer w0.254: v1(6.274,-11.125) 9.982,-11.125 13.03,-14.173 13.03,-15.418 17.983,-20.371 Led1.1
NetLed2_1: Led2.1 R14.1 | length 36.3
  Top Layer w0.254: v1(-20.015,20.269) -16.256,20.269 -10.719,14.732 8.28,14.732 8.839,14.173 R14.1
  Bottom Layer w0.254: Led2.1 v1(-20.015,20.269)
NetLed3_1: Led3.1 R15.1 | length 19.7
  Top Layer w0.254: R15.1 9.093,7.976 9.652,8.534 9.652,13.741 16.535,20.625 v1(20.218,20.625)
NetLed4_1: Led4.1 R16.1 | length 16.4
  Bottom Layer w0.254: Led4.1 -17.704,-20.218 -8.179,-10.693 v1(-7.569,-10.693)
NetMT1_1: MT1.1 Q1.3 | length 9.2
  Top Layer w0.406: v1(-17.907,-17.755) Q1.3@-17.856,-17.805
  Bottom Layer w0.406: MT1.1 -24.181,-21.133 -20.803,-17.755 v1(-17.907,-17.755)
NetMT2_1: MT2.1 Q2.3 | length 9.4
  Bottom Layer w0.406: MT2.1 -22.167,24.028 -20.955,24.028 -17.602,20.676 -17.602,17.932 v1(-17.856,17.678)
NetMT3_1: MT3.1 Q3.3 | length 9.3
  Bottom Layer w0.406: v1(17.831,17.983) 17.831,20.98 20.93,24.079 22.53,24.079 MT3.1
NetMT4_1: MT4.1 Q4.3 | length 9.4
  Top Layer w0.406: Q4.3@17.932,-17.932 v1(18.034,-17.831)
  Bottom Layer w0.406: v1(18.034,-17.831) 20.828,-17.831 24.13,-21.133 24.13,-22.523 MT4.1
NetQ1_1: Q1.1 R9.2 R11.1 | length 3.4
  Top Layer w0.254: Q1.1 -12.91,-14.289 R11.1
NetQ2_1: Q2.1 R10.2 R12.1 | length 3.5
  Top Layer w0.254: Q2.1 -14.315,12.783 R12.1
NetQ3_1: Q3.1 R17.2 R19.1 | length 3.3
  Top Layer w0.254: R19.1 15.367,16.828 Q3.1
NetQ4_1: Q4.1 R18.2 R20.1 | length 3.4
  Top Layer w0.254: R20.1 14.421,-13.174 R18.2 15.483,-14.255 Q4.1
OSC1: C20.1 CT1.2 U5.39 | length 7.6
  Top Layer w0.254: CT1.2@-12.014,-0.051 -9.795,-2.27 U5.39
  Bottom Layer w0.254: C20.1@-12.738,0.47 v1(-12.116,-0.152)
OSC2: C21.1 CT1.1 U5.40 | length 7.3
  Top Layer w0.254: CT1.1@-12.014,-4.369 -11.354,-4.369 -9.755,-2.77 U5.40
  Bottom Layer w0.254: C21.1@-12.7,-4.928 v1(-12.116,-4.343)
PWM1: R17.1 U5.46 | length 42.4
  Top Layer w0.254: v1(-7.239,-7.468) -7.239,-6.172 -6.836,-5.77 U5.46
  Bottom Layer w0.254: v1(-7.239,-7.468) -7.239,-6.248 -6.909,-5.918 -6.909,3.607 -6.223,4.293 0.305,4.293 0.838,4.826 0.838,8.636 1.549,9.347 10.033,9.347 14.834,14.148 v1(15.189,14.148)
PWM2: R10.1 U5.49 | length 33
  Top Layer w0.254: v1(-15.494,12.497) -14.326,11.328 -14.326,-5.283 -10.744,-8.865 -5.664,-8.865 -5.388,-8.588 U5.49
  Bottom Layer w0.254: v1(-15.494,12.497) -15.494,13.411 v1(-13.868,15.037)
PWM3: R9.1 U5.50 | length 14.8
  Top Layer w0.254: R9.1 -15.011,-14.046 -14.072,-14.046 -12.954,-12.929 -9.068,-12.929 -7.925,-11.786 -6.807,-11.786 -6.528,-11.506 -6.528,-9.83 -6.248,-9.55 -5.436,-9.55 -4.888,-9.002 U5.50
PWM4: R18.1 U5.51 | length 24.5
  Top Layer w0.254: v1(-4.724,-9.728) -4.388,-9.391 U5.51
  Bottom Layer w0.254: v1(-4.724,-9.728) -4.724,-9.957 -4.42,-10.262 10.033,-10.262 14.326,-14.554 v1(14.326,-15.57)
RX: J1.1 U5.31 | length 19.7
  Top Layer w0.254: U5.31 -4.888,2.732 -4.597,3.023 v1(-4.318,3.023)
  Bottom Layer w0.254: v1(-4.318,3.023) 3.175,3.023 5.131,4.978 J1.1
SCK: MD1.5 U5.60 | length 7.5
  Top Layer w0.254: MD1.5 -3.2,-12.395 -1.575,-10.77 -0.381,-10.77 0.112,-10.276 U5.60
SCL: IC1.23 R5.1 U4.8 U5.44 | length 28
  Top Layer w0.254: R5.1@-11.328,4.851 -12.167,5.69 -12.675,5.69 -13.132,6.147 -13.132,7.163 -12.852,7.442 -11.278,7.442 -11.095,7.625 IC1.23 ; v1(-11.278,4.699) R5.1 ; v1(-8.433,-5.994) -7.208,-4.77 U5.44
  Bottom Layer w0.254: U4.8 -13.849,-6.915 -12.929,-5.994 -10.693,-5.994 ; v1(-11.278,4.699) -12.014,3.962 -12.014,2.616 -11.405,2.007 -11.405,-5.283 -10.693,-5.994 ; v1(-8.433,-5.994) -10.693,-5.994
SDA: IC1.24 R4.1 U4.7 U5.43 | length 26.6
  Top Layer w0.254: v1(-10.82,-6.807) -10.236,-6.807 v1(-8.204,-4.775) -7.699,-4.27 U5.43 ; v1(-10.719,6.96) -10.554,7.125 IC1.24
  Bottom Layer w0.254: U4.7 -12.964,-9.078 -12.624,-8.738 -12.624,-7.214 -12.217,-6.807 v1(-10.82,-6.807) ; v1(-11.049,3.15) -10.617,3.15 -10.617,-4.826 -10.008,-5.436 -8.865,-5.436 v1(-8.204,-4.775) ; v1(-10.719,6.96) -10.541,6.782 -10.541,3.226
TX: J1.2 U5.32 | length 21.7
  Top Layer w0.254: U5.32 v1(-5.388,3.508)
  Bottom Layer w0.254: v1(-5.388,3.508) -5.162,3.734 2.819,3.734 6.629,7.544 J1.2
VCC: C5.2 C6.1 L1.1 MT1.2 MT2.2 MT3.2 MT4.2 PIN.1 U2.4 U2.5 | length 182.8
  Top Layer w0.406: v1(-22.555,-24.105) -24.105,-22.555 -24.105,-19.99 -14.427,-10.312 v1(-14.427,-6.426) ; PIN.1@9.957,-13.614 9.957,-12.675 12.247,-10.385 C6.1 11.963,-9.826 11.963,-8.218 C5.2 12.09,-7.606 U2.4 U2.5 12.116,-4.47 L1.1
  Bottom Layer w0.406: MT2.2 -24.028,19.99 -14.427,10.389 v1(-14.427,-6.426) ; MT1.2@-22.555,-24.248 -20.412,-24.248 -10.617,-14.453 8.661,-14.453 PIN.1 9.931,-13.564 20.777,-24.409 MT4.2 23.571,-25.197 24.74,-25.197 26.264,-23.673 26.264,-22.174 14.529,-10.439 14.529,11.1 24.4,20.971 MT3.2
XCL: IC1.7 U1.1 | length 7.9
  Top Layer w0.254: IC1.7 -5.093,7.125 -4.724,6.756 v1(-4.724,6.604) ; v1(-1.575,9.373) -1.214,9.011 U1.1
  Bottom Layer w0.254: v1(-4.724,6.604) -3.835,6.604 -3.353,7.087 -3.353,9.042 -3.023,9.373 v1(-1.575,9.373)
XDA: IC1.6 U1.16 | length 11.3
  Top Layer w0.254: IC1.6 -6.604,5.715 -6.375,5.486 -5.486,5.486 v1(-5.436,5.537) ; v1(-1.651,10.287) -1.448,10.287 -0.594,9.433 U1.16
  Bottom Layer w0.254: v1(-5.436,5.537) -5.436,6.947 -5.118,7.264 -4.14,7.264 -3.861,7.544 -3.861,9.296 -2.87,10.287 v1(-1.651,10.287)
pads on no net: C1.0 C2.0 C3.0 C4.0 C5.0 C7.0 C8.0 C11.0 C12.0 C13.0 C14.0 C15.0 C16.0 C17.0 C18.0 C19.0 C20.0 C21.0 D1.0 IC1.2 IC1.3 IC1.4 IC1.5 IC1.14 IC1.15 IC1.16 IC1.17 IC1.19 IC1.21 IC1.22 U1.3 U1.5 U1.6 U1.7 U1.14 U3.4 U4.6 U5.1 U5.2 U5.3 U5.4 U5.5 U5.6 U5.8 U5.11 U5.12 U5.13 U5.14 U5.17 U5.18 U5.21 U5.22 U5.23 U5.24 U5.27 U5.28 U5.29 U5.30 U5.33 U5.36 U5.37 U5.47 U5.48 U5.53 U5.54 U5.55 U5.63
copper on no net:
  other v3: -34.315,-34.315 34.315,-34.315 -34.29,34.315 34.341,34.341
  other v4: -26.2,-26.2 26.187,-26.187 26.187,26.187 -26.213,26.238

## Keep-outs
Keep-Out Layer:
  lines w0.254: -33.83,-28.725 ccw(c-34.313,-34.313) -28.727,-33.807 -14.111,-19.191 ; -33.818,-28.738 -19.191,-14.111 ccw(c-28.731,-4.572) -15.24,-4.572 -15.24,4.572 ccw(c-28.731,4.572) -19.191,14.111 -33.795,28.715 ; -33.782,28.727 cw(c-34.287,34.313) -28.7,33.83 ; -28.725,33.805 -14.111,19.191 ccw(c-4.623,28.68) -4.572,15.261 ; -14.112,-19.191 cw(c-4.574,-28.729) -4.572,-15.24 4.572,-15.24 cw(c4.572,-28.731) 14.111,-19.191 28.738,-33.818 ; -4.551,15.24 4.572,15.24 ccw(c4.572,28.731) 14.111,19.191 28.753,33.833 cw(c34.338,34.338) 33.856,28.751 ; 28.725,-33.83 ccw(c34.313,-34.313) 33.807,-28.727 19.191,-14.111 cw(c28.731,-4.572) 15.24,-4.572 15.24,4.572 cw(c28.731,4.572) 19.191,14.111 33.858,28.778

## Silkscreen, mask and mechanical layers (free items; w line width, h text height)
Top Overlay:
  lines w0.254: -31.623,28.448 ccw(c-32.245,32.257) -28.456,31.521 ; -31.613,28.491 -30.915,29.7 ; -31.603,28.443 -30.29,27.965 ; -31.508,-28.448 -30.195,-27.97 ; -31.496,-28.456 cw(c-32.232,-32.245) -28.423,-31.623 ; -31.486,-28.44 -30.788,-29.65 ; -24.016,-22.974 -24.016,-24.244 ; -22.974,-24.244 -24.016,-24.244 ; -18.377,-18.605 -24.016,-24.244 ; 18.697,-18.768 24.059,-24.13 ; 22.86,-24.13 24.059,-24.13 ; 24.059,-22.931 24.059,-24.13 ; 28.431,-31.47 cw(c32.22,-32.207) 31.598,-28.397 ; 28.499,31.648 ccw(c32.308,32.271) 31.572,28.481 ; 30.214,27.965 31.527,28.443 ; 30.297,-27.919 31.61,-28.397 ; 30.845,29.726 31.544,28.516 ; 30.889,-29.599 31.588,-28.389 ; -1.626,-12.167 -0.152,-13.64 1.346,-12.141 0.229,-12.141 0.229,-10.033 -0.559,-10.033 -0.559,-12.167 -1.626,-12.167
  text "Made by NhatBK / Made in VietNam" at -15.164,-8.382 h1.14
  text "-  +" at 7.544,-15.646 h2.29
  text "y" at 23.038,-21.946 h1.14
  text "x" at -23.901,-22.454 h1.14
Mechanical 1:
  lines w0.013: -33.872,-28.826 ccw(c-34.321,-34.307) -28.839,-33.859 ; -33.859,28.841 cw(c-34.307,34.323) -28.826,33.874 ; 28.828,-33.872 ccw(c34.309,-34.321) 33.861,-28.839 ; 28.841,33.861 cw(c34.323,34.309) 33.874,28.828

## Dimensions
-40,40 to 40,40 on Top Overlay

## Text inside footprints (layer, text, board x,y; h text height)
MD1: Bottom Overlay "GND" at -0.025,-11.278 h1.02 r270; Bottom Overlay "3V3" at 1.499,-11.278 h1.02 r270